# Altium PCB OSRC.PcbDoc
Units mm, origin at the board's own origin, x right, y up, seen from the top; angles counter-clockwise.
Board outline 50 x 50 mm, 2 copper layers (Top Layer, Bottom Layer); 31 components, 30 nets, 129 pads, 0 vias.
Unrouted connection lines stored in the file: 73.
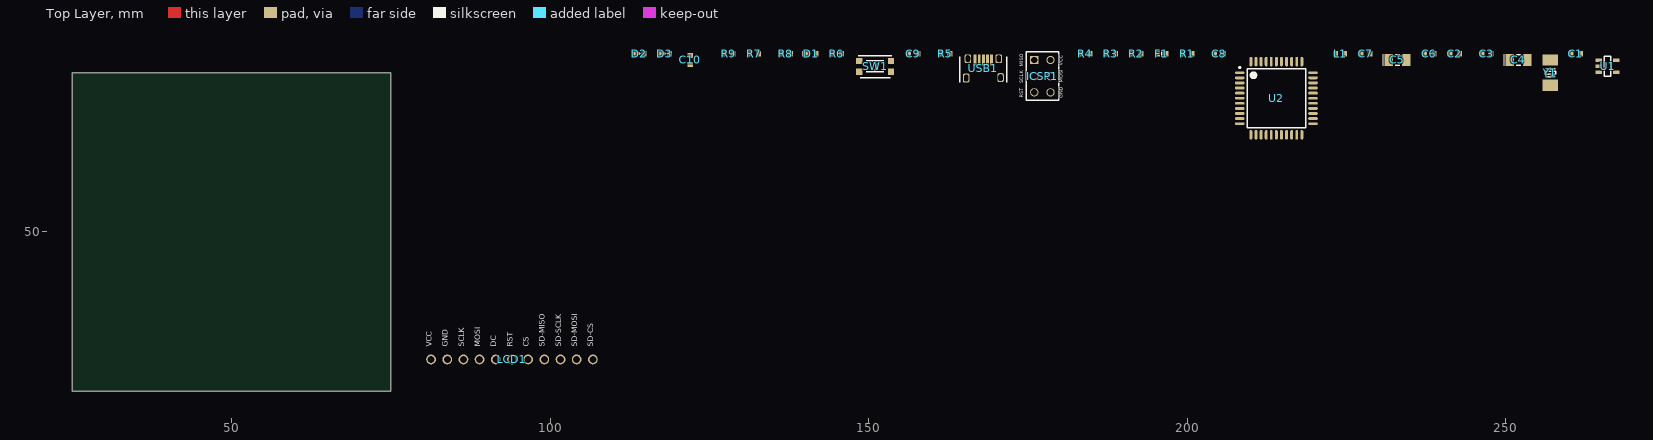
[diagram p0: Top Layer view]
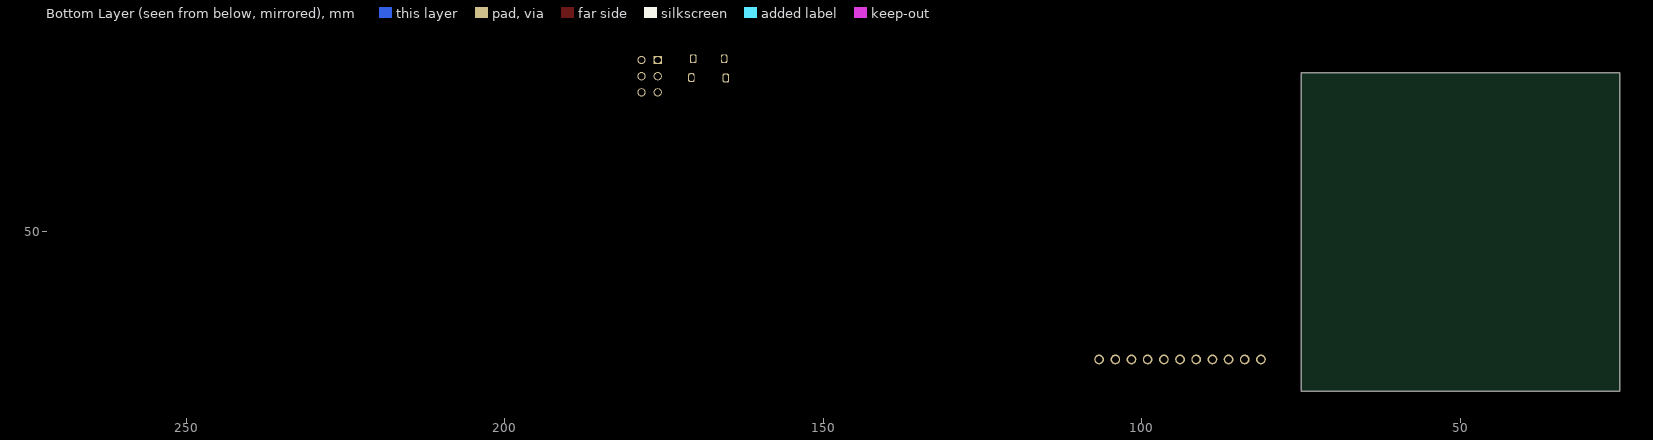
[diagram p1: Bottom Layer view, seen from below]

## Layer stack, top to bottom
Top Solder: solder mask 0.0102, Solder Resist, Dk 3.5
Top Layer: signal copper 0.0356
Dielectric 1: dielectric 0.32, FR-4, Dk 4.8
Bottom Layer: signal copper 0.0356
Bottom Solder: solder mask 0.0102, Solder Resist, Dk 3.5

## Board outline
25,25 75,25 75,75 25,75

## Design rules (kind name [scope] priority, off if disabled: settings)
Clearance [All] p1: gap=0.152
DiffPairsRouting [All] p1: maxlimit=0.254 minlimit=0.254 mostfreqgap=0.254 toplayer_minwidth=0.152 toplayer_maxwidth=0.381 toplayer_prefwidth=0.152 bottomlayer_minwidth=0.152 bottomlayer_maxwidth=0.381 bottomlayer_prefwidth=0.152 maxuncoupledlength=12.7
HoleSize [All] p1: absolutevalues=TRUE maxlimit=6.35 minlimit=0.3 maxpercent=80.000 minpercent=20.000
MinimumSolderMaskSliver [All] p1: minsoldermaskwidth=0.1
PlaneClearance [All] p1: clearance=0.25
PlaneConnect [All] p1: planeconnectstyle=Relief reliefexpansion=0.5 reliefentries=4 reliefconductorwidth=0.254 reliefairgap=0.254
PolygonConnect PolygonConnect-GND-VIA [InNet('GND') AND IsVia] p1: connectstyle=Direct reliefconductorwidth=0.254 reliefentries=4 polygonreliefangle="90 Angle" airgapwidth=0.254
PolygonConnect [All] p2: connectstyle=Relief reliefconductorwidth=0.254 reliefentries=4 polygonreliefangle="90 Angle" airgapwidth=0.254
RoutingVias [All] p1: holewidth=0.3 width=0.6 viastyle="Through Hole" minholewidth=0.3 minwidth=0.6 maxholewidth=6.35 maxwidth=8
SilkToSilkClearance [All] p1: silktosilkclearance=0
SilkToSolderMaskClearance [IsPad] p1: minsilkscreentomaskgap=0.05 clearancetoexposedcopper=TRUE
SolderMaskExpansion [All] p1: expansion=0.102
UnpouredPolygon [All] p1: allowunpoured=FALSE
Width [All] p1: maxlimit=4 minlimit=0.152 preferedwidth=0.152
22 further rules are at their usual default settings.

## Components (designator, comment, footprint, x,y, rotation, side; value= is the part's Value field where it differs from the comment)
C1 "CAPACITOR" CAP-0603-GEN 261,78 r0 top
C2 "CAPACITOR" CAP-0603-GEN 242,78 r0 top
C3 "CAPACITOR" CAP-0603-GEN 247,78 r0 top
C4 "CAPACITOR-POLARIZED" CAP-1206-POL 252,77 r0 top
C5 "CAPACITOR-POLARIZED" CAP-1206-POL 233,77 r0 top
C6 "CAPACITOR" CAP-0603-GEN 238,78 r0 top
C7 "CAPACITOR" CAP-0603-GEN 228,78 r0 top
C8 "CAPACITOR" CAP-0603-GEN 205,78 r0 top
C9 "CAPACITOR" CAP-0603-GEN 157,78 r0 top
C10 "CAPACITOR" CAP-0603-GEN 122,77 r90 top
D1 "DIODE" DIODE-0603 141,78 r0 top
D2 "LED" LED-0603 114,78 r0 top
D3 "LED" LED-0603 118,78 r0 top
F1 "Fuse" FUSE-0603 196,78 r0 top
ICSP1 "ICSP" ICSP-HEADER 176,77 r0 top
L1 "Ferrite bead" FERRITE-0603 224,78 r0 top
LCD1 "LCD" ST7735 94,30 r0 top
R1 "RESISTOR" RESISTOR-0603 200,78 r0 top
R2 "Varistor" RESISTOR-0603 192,78 r0 top
R3 "RESISTOR" RESISTOR-0603 188,78 r0 top
R4 "Varistor" RESISTOR-0603 184,78 r0 top
R5 "Resistor" RESISTOR-0603 162,78 r0 top
R6 "RESISTOR" RESISTOR-0603 145,78 r0 top
R7 "Resistor" RESISTOR-0603 132,78 r0 top
R8 "Resistor" RESISTOR-0603 137,78 r0 top
R9 "RESISTOR" RESISTOR-0603 128,78 r0 top
SW1 "434353045816" WURTH-TACTILE-434353045816 151,76 r0 top
U1 "Reg" SOT23-5 266,76 r0 top
U2 "ATmega32U4" TQFP44 214,71 r0 top
USB1 "USB Connector" USB-MICRO-B 168,77 r0 top
Y1 "CRYSTAL" CRYSTAL-5032 257,75 r90 top

## Footprints (in the part's own frame and the unit in brackets; to place one, negate y for a bottom-side part, rotate by r counter-clockwise, add the part's x,y. Pads: shape width x height; smd on the part's side, far side on the other; paste and mask are expansions set on the pad)
CAP-0603-GEN [mm] "Non-polarized 0603 (1608) chip capacitor"
  rect 0.8x0.9 smd: 1(-0.725,0) 2(0.725,0)
  body extent -0.8,-0.4 0.8,0.4, height 0.86
CAP-1206-POL [mm] "1206 (3216) polarized chip capacitor"
  rect 1.3x1.85 smd: 1(-1.375,0) 2(1.375,0)
  silkscreen extent -2.25,-0.9 0.35,0.9, body extent -1.6,-0.8 1.6,0.8, height 1.6
CRYSTAL-5032 [mm] "SMD Crystal 5x3.2mm"
  rect 1.8x2.4 smd: 1(-2,0) 2(2,0)
  silkscreen extent -0.77,-0.85 0.77,0.85, body extent -2.5,-1.6 2.5,1.6, height 1.35
DIODE-0603 [mm] "0603 (1608) Diode"
  rect 0.8x0.9 smd: 1(-0.725,0) 2(0.725,0)
  silkscreen extent -1.35,-0.38 -1.35,0.37, body extent -0.85,-0.4 0.85,0.4, height 0.56
FERRITE-0603 [mm] "Chip resistor 0603 (1608)"
  rect 0.8x0.9 smd: 1(-0.725,0) 2(0.725,0)
  body extent -0.8,-0.4 0.8,0.4, height 0.5
FUSE-0603 [mm] "0603 (1608) resettable fuse"
  rect 0.75x0.9 smd: 1(-0.675,0) 2(0.675,0)
  silkscreen extent 0,-0.5 0,0.5, body extent -0.8,-0.42 0.8,0.43, height 0.45
ICSP-HEADER [mm] "ICSP standard header"
  rect 1.3x1.3 hole 1: 1(0,0)
  round 1.3 hole 1: 2(2.54,0) 3(0,-2.54) 4(2.54,-2.54) 5(0,-5.08) 6(2.54,-5.08)
  silkscreen extent -1.28,-6.35 3.8,1.28, body extent -1.27,-6.35 3.81,1.27, height 7.84
LED-0603 [mm] "0603 (1608) LED"
  rect 0.8x0.9 smd: 1(-0.725,0) 2(0.725,0)
  silkscreen extent -0.13,-0.19 0.13,0.19, body extent -0.82,-0.36 0.83,0.36, height 0.66
RESISTOR-0603 [mm] "Chip resistor 0603 (1608)"
  rect 0.8x0.9 smd: 1(-0.725,0) 2(0.725,0)
  body extent -0.8,-0.4 0.8,0.4, height 0.5
SOT23-5 [mm] "SOT23 5-Leads"
  rect 1x0.55 smd: 1(-1.375,0.95) 2(-1.375,0) 3(-1.375,-0.95) 4(1.375,-0.95) 5(1.375,0.95)
  silkscreen extent -0.5,-1.55 0.5,1.55, body extent -1.4,-1.45 1.4,1.45, height 1.45
ST7735 [mm] "ST7737 128x160 LCD"
  round 1.54 hole 1.1: 1(-12.7,0) 2(-10.16,0) 3(-7.62,0) 4(-5.08,0) 5(-2.54,0) 6(0,0) 7(2.54,0) 8(5.08,0) 9(7.62,0) 10(10.16,0) 11(12.7,0)
  body extent -17.03,-1.87 16.97,48.13, height 6.64
TQFP44 [mm] "TQFP, 44-Leads, Body 10,00x10,00mm, Pitch 0,80mm"
  oval 1.5x0.45 smd: 1(-5.75,4) 2(-5.75,3.2) 3(-5.75,2.4) 4(-5.75,1.6) 5(-5.75,0.8) 6(-5.75,0) 7(-5.75,-0.8) 8(-5.75,-1.6) 9(-5.75,-2.4) 10(-5.75,-3.2) 11(-5.75,-4) 23(5.75,-4) 24(5.75,-3.2) 25(5.75,-2.4) 26(5.75,-1.6) 27(5.75,-0.8) 28(5.75,0) 29(5.75,0.8) 30(5.75,1.6) 31(5.75,2.4) 32(5.75,3.2) 33(5.75,4)
  oval 0.45x1.5 smd: 12(-4,-5.75) 13(-3.2,-5.75) 14(-2.4,-5.75) 15(-1.6,-5.75) 16(-0.8,-5.75) 17(0,-5.75) 18(0.8,-5.75) 19(1.6,-5.75) 20(2.4,-5.75) 21(3.2,-5.75) 22(4,-5.75) 34(4,5.75) 35(3.2,5.75) 36(2.4,5.75) 37(1.6,5.75) 38(0.8,5.75) 39(0,5.75) 40(-0.8,5.75) 41(-1.6,5.75) 42(-2.4,5.75) 43(-3.2,5.75) 44(-4,5.75)
  silkscreen extent -5.87,-4.6 4.6,4.95, body extent -6.01,-6.01 6.01,6.01, height 1
USB-MICRO-B [mm] "FCI 10103594-0001LF"
  rect 0.45x1.75 smd: 1(-1.3,0) 2(-0.65,0) 3(0,0) 4(0.65,0) 5(1.3,0)
  rrect50% 1x1.4 hole 0.66 slot 1.05 at 90 deg: SH(-2.705,-2.83) SH(-2.425,0.2) SH(2.425,0.2) SH(2.705,-2.77)
  silkscreen extent -3.7,-3.5 3.7,0.5, body extent -4.02,-5.6 4.02,0.43, height 2.89
WURTH-TACTILE-434353045816 [mm] "4.7*3.5mm side push type, J-Bend SMD, height 1.65mm, white actuator, 160gf, T&R"
  rect 1x1 smd: 1(2.5,0.85) 2(2.5,-0.85) 3(-2.5,0.85) 4(-2.5,-0.85)
  silkscreen extent -2.65,-1.75 2.65,1.65, body extent -2.75,-2.75 2.75,1.75, height 1.65

## Part data
C1 C2 C3 C6 C7 C8 C9 C10: "Capacitor"
C4 C5: "Polarized capacitor"
D1: "Diode"
F1: library part FUSE
ICSP1: "In-circuit serial programmer interface"
L1: library part FERRITE-BEAD
LCD1: library part ST7735, "ST7735 color LCD"
R1 R3 R6 R9: "Resistor"
R2 R4: library part VARISTOR
R5 R7 R8: library part RESISTOR-SMALL
SW1: library part WURTH-TACTILE-434353045816, "WS-TASU SMD Tact Switch 4.7X3.5 mm side push"
U1: library part SOT23-REG, "Voltage regulator"
U2: "8-bit AVR Microcontroller, 2.7-5.5V, 16MHz, 32KB Flash, 1KB EEPROM, 2.5KB SRAM, USB Controller, 44-pin TQFP, Industrial Grade (-40°C to 85°C), Ext Osc"
USB1: library part USB-CONNECTOR
Y1: "Crystal oscillator"

## Nets (pads, with @x,y where several pads share a name; then routed paths per layer and width w, separated by ;. In a path a pad name is that pad's centre, name@x,y a point inside that pad or via, vN(x,y) a via of type N, cw(c..) or ccw(c..) an arc to the next point about the centre after c; other vN are vias at no path point)
3V3: C4.1 C5.1 L1.2 U1.5 U2.2 U2.14 U2.34
D+: R3.2 U2.4
D-: R1.2 U2.3
GND: C1.1 C2.1 C3.1 C4.2 C5.2 C6.2 C7.1 C8.1 C9.2 C10.1 D2.2 D3.2 ICSP1.6 LCD1.2 R2.2 R4.2 R5.1 SW1.1 SW1.3 U1.2 U2.5 U2.15 U2.23 U2.35 U2.43 USB1.5
LCD_CS: LCD1.7 U2.26
LCD_DC: LCD1.5 U2.25
LCD_RESET: LCD1.6 U2.1
MCU-RESET: C10.2 D1.1 ICSP1.5 R6.1 R9.2 U2.13
MISO: ICSP1.1 U2.11
MOSI: ICSP1.4 LCD1.4 U2.10
NetC3_2: C3.2 U1.4
NetC6_1: C6.1 L1.1 U2.24 U2.44
NetC8_2: C8.2 U2.6
NetC9_1: C9.1 U2.42
NetD2_1: D2.1 R7.1
NetD3_1: D3.1 R8.1
NetF1_1: F1.1 USB1.1
NetR1_1: R1.1 R2.1 USB1.2
NetR3_1: R3.1 R4.1 USB1.3
NetR5_2: R5.2 U2.33
NetR9_1: R9.1 SW1.2 SW1.4
POWER_ENABLED: U1.3
RX-LED: R8.2 U2.8
SCLK: ICSP1.3 LCD1.3 U2.9
TX-LED: R7.2 U2.22
VCC: C2.2 ICSP1.2 U1.1
VCC_MCU: D1.2 LCD1.1 R6.2
VUSB: F1.2 U2.7
XTAL1: C1.2 U2.17 Y1.2
XTAL2: C7.2 U2.16 Y1.1
pads on no net: LCD1.8 LCD1.9 LCD1.10 LCD1.11 U2.12 U2.18 U2.19 U2.20 U2.21 U2.27 U2.28 U2.29 U2.30 U2.31 U2.32 U2.36 U2.37 U2.38 U2.39 U2.40 U2.41 USB1.4 USB1.SH

## Silkscreen, mask and mechanical layers (free items; w line width, h text height)
Mechanical 1:
  the board outline again, w0.2

## Text inside footprints (layer, text, board x,y; h text height)
ICSP1: Top Overlay "MISO" at 174.475,75.91 h1 r90; Top Overlay "VCC" at 180.7,76.076 h1 r90; Top Overlay "SCLK" at 174.475,73.314 h1 r90; Top Overlay "MOSI" at 180.7,73.391 h1 r90; Top Overlay "RST" at 174.475,71.07 h1 r90; Top Overlay "GND" at 180.7,70.974 h1 r90
LCD1: Top Overlay "SD-CS" at 107.108,32 h1.5 r90; Top Overlay "SD-MOSI" at 104.569,32 h1.5 r90; Top Overlay "SD-SCLK" at 102.029,32 h1.5 r90; Top Overlay "SD-MISO" at 99.489,32 h1.5 r90; Top Overlay "CS" at 96.949,32 h1.5 r90; Top Overlay "RST" at 94.409,32 h1.5 r90; Top Overlay "DC" at 91.868,32 h1.5 r90; Top Overlay "MOSI" at 89.329,32 h1.5 r90; Top Overlay "SCLK" at 86.79,32 h1.5 r90; Top Overlay "GND" at 84.25,32 h1.5 r90; Top Overlay "VCC" at 81.708,32 h1.5 r90